# Altium PCB PLC-无线通讯版-显示板-V2.PcbDoc
Units mm, origin at the board's own origin, x right, y up, seen from the top; angles counter-clockwise.
Board outline 112 x 42 mm, 2 copper layers (Top Layer, Bottom Layer), stack 1.271 mm thick; 31 components, 28 nets, 106 pads, 86 vias.
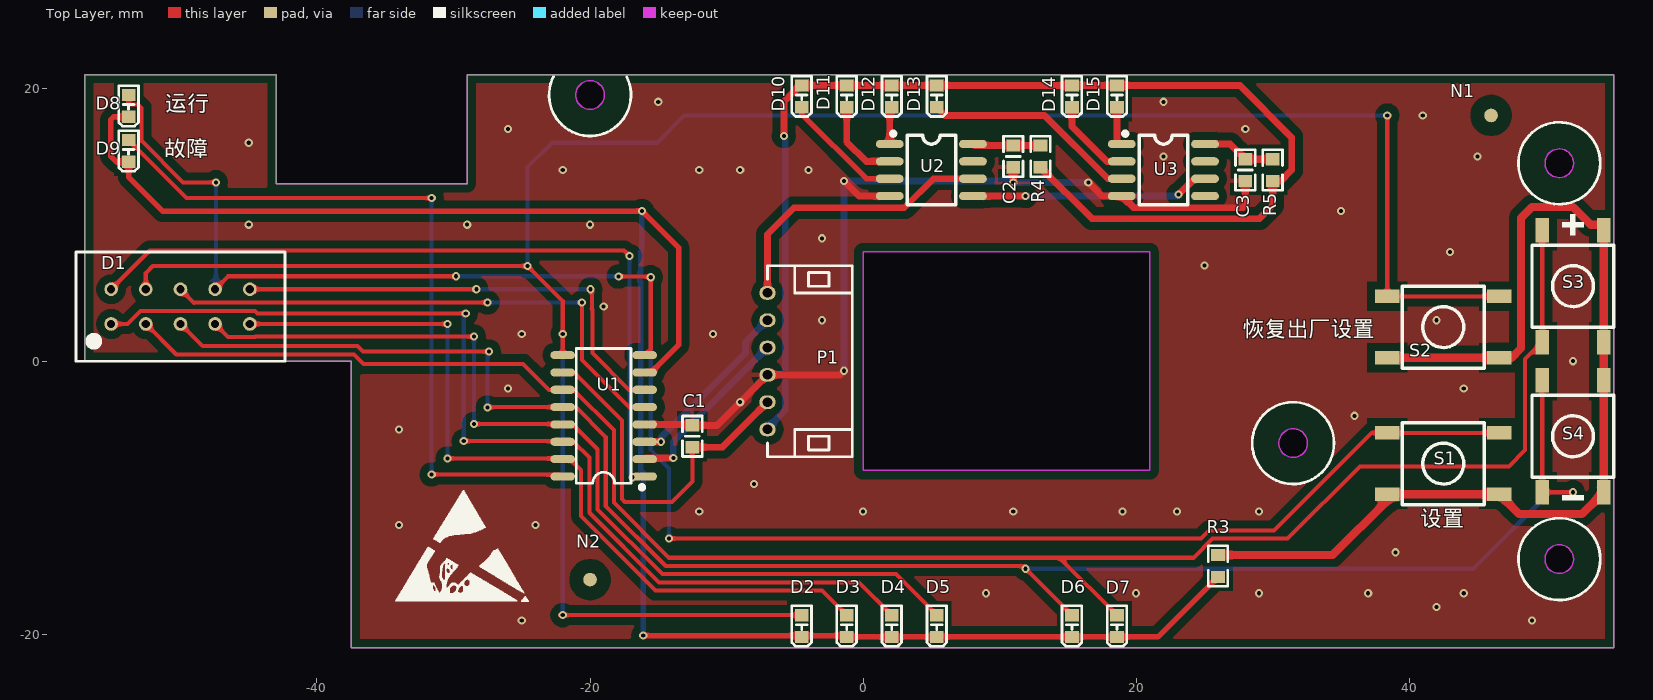
[diagram p0: Top Layer view]
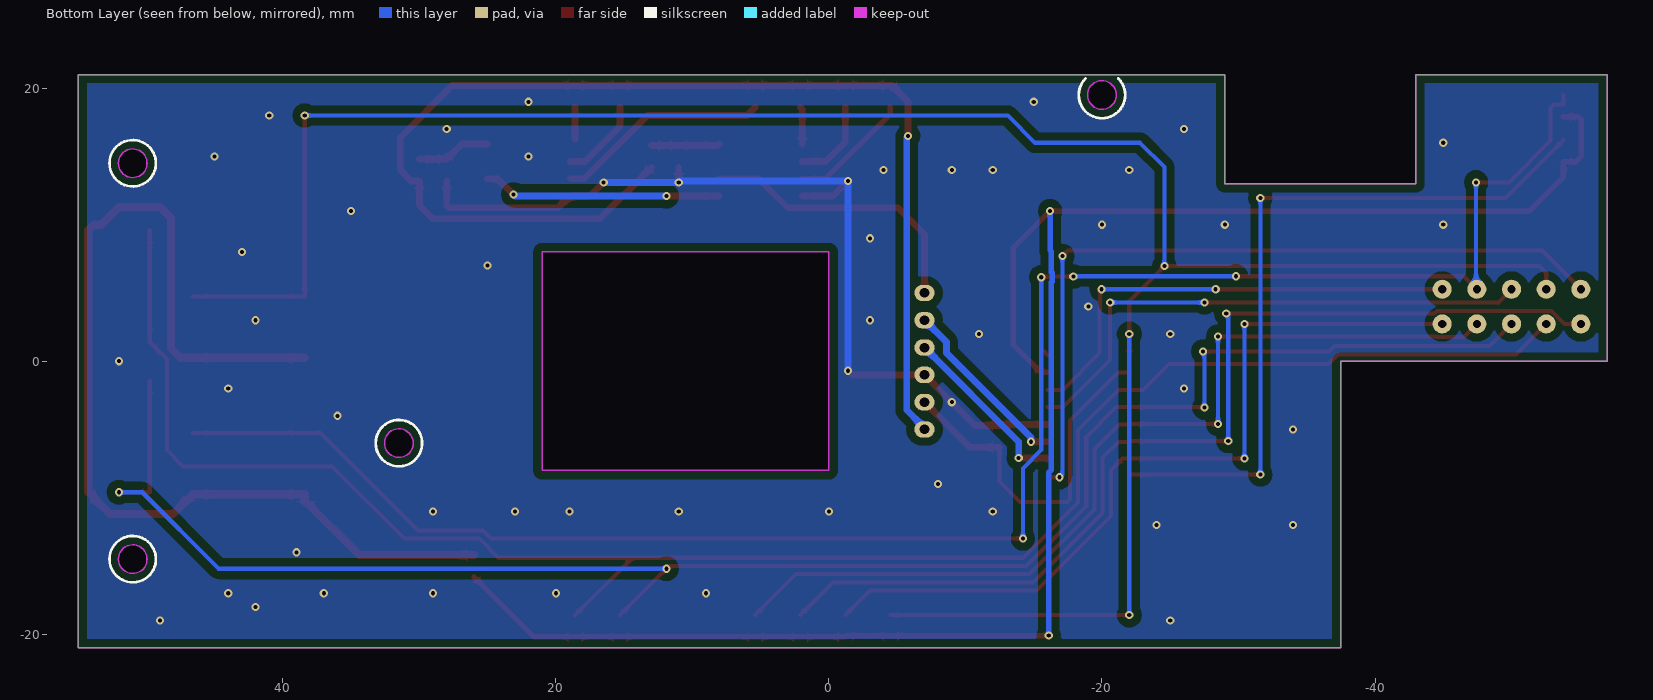
[diagram p1: Bottom Layer view, seen from below]
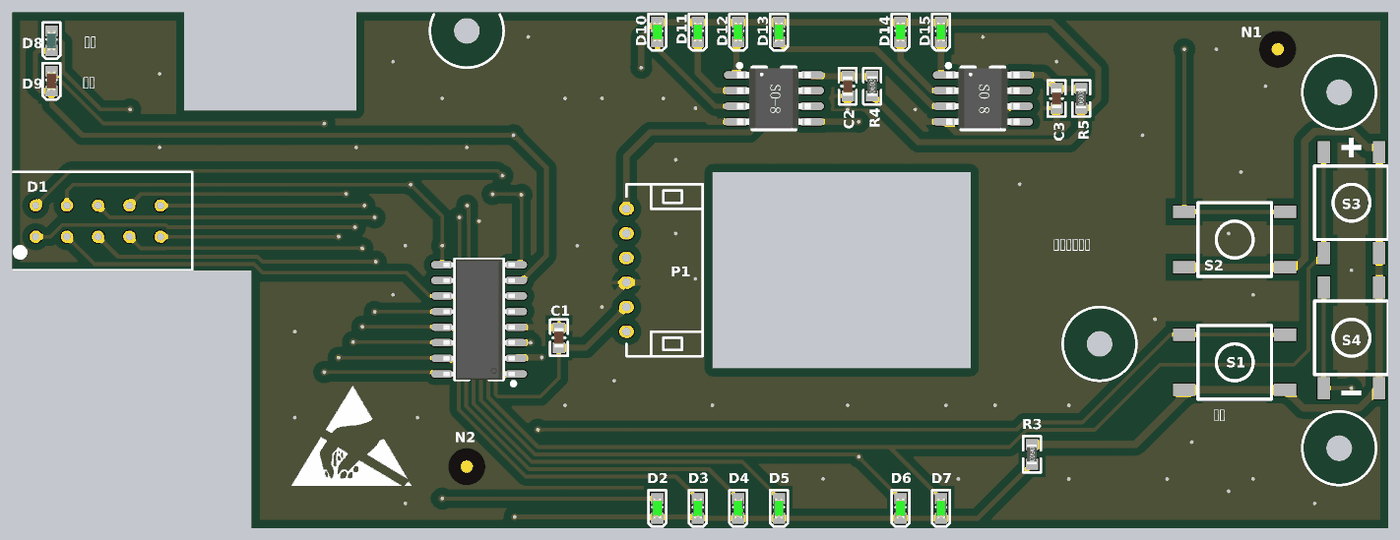
[diagram p2: 3D render of the assembled board from above, using the file's embedded part models]

## Layer stack, top to bottom
Top Solder: solder mask 0.0102, Solder Resist, Dk 3.5
Top Layer: signal copper 0.0356
Dielectric1: dielectric 1.2, FR-4, Dk 4.8
Bottom Layer: signal copper 0.0356
Bottom Solder: solder mask 0.0102, Solder Resist, Dk 3.5

## Board outline
-57,0 -57,21 -43,21 -43,13 -29,13 -29,21 55,21 55,-21 -37.5,-21 -37.5,0
cut-out: -20,20.55 ccw(c-20,19.5) -21.05,19.5 ccw(c-20,19.5) -20,18.45 ccw(c-20,19.5) -18.95,19.5 ccw(c-20,19.5)
cut-out: 51,15.55 ccw(c51,14.5) 49.95,14.5 ccw(c51,14.5) 51,13.45 ccw(c51,14.5) 52.05,14.5 ccw(c51,14.5)
cut-out: 31.5,-4.95 ccw(c31.5,-6) 30.45,-6 ccw(c31.5,-6) 31.5,-7.05 ccw(c31.5,-6) 32.55,-6 ccw(c31.5,-6)
cut-out: 0,-8 21,-8 21,8 0,8
cut-out: 51,-13.45 ccw(c51,-14.5) 49.95,-14.5 ccw(c51,-14.5) 51,-15.55 ccw(c51,-14.5) 52.05,-14.5 ccw(c51,-14.5)

## Design rules (kind name [scope] priority, off if disabled: settings)
Clearance Clearance敷铜间隔 [InPolygon] p1: gap=0.6
Clearance Clearance通用间隔 [All] p2: gap=0.3
PlaneConnect [All] p1: planeconnectstyle=Relief reliefexpansion=0.508 reliefentries=4 reliefconductorwidth=0.3 reliefairgap=0.3
PolygonConnect PolygonConnect_过孔 [All vs IsVia] p1: connectstyle=Direct reliefconductorwidth=0.254 reliefentries=4 polygonreliefangle="90 Angle" airgapwidth=0.254
PolygonConnect [All] p2: connectstyle=Relief reliefconductorwidth=0.3 reliefentries=4 polygonreliefangle="90 Angle" airgapwidth=0.6
RoutingVias [All] p1: holewidth=0.5 width=1 viastyle="Through Hole" minholewidth=0.4 minwidth=0.8 maxholewidth=10 maxwidth=10
SolderMaskExpansion [All] p1: expansion=0.102
Width [All] p1: maxlimit=10 minlimit=0.3 preferedwidth=0.5
29 further rules are at their usual default settings.

## Components (designator, comment, footprint, x,y, rotation, side; value= is the part's Value field where it differs from the comment)
C1 "105" C-0603 -12.5,-5.5 r270 top
C2 "104" C-0603 11,15 r90 top
C3 "104" C-0603 28,14 r90 top
D1 "2351A，黄绿色，没小数点" 3位0.25英寸 -50,4 r0 top
D2 "DI1" LED-0603-GREEN -4.5,-19.4 r90 top
D3 "DI2" LED-0603-GREEN -1.2,-19.4 r90 top
D4 "DI3" LED-0603-GREEN 2.1,-19.4 r90 top
D5 "DI4" LED-0603-GREEN 5.4,-19.4 r90 top
D6 "DO1" LED-0603-GREEN 15.3,-19.4 r90 top
D7 "DO2" LED-0603-GREEN 18.6,-19.4 r90 top
D8 "运行" LED-0603-Blue -53.8,18.7 r90 top
D9 "错误" LED-0603-Red -53.8,15.4 r90 top
D10 "AI1" LED-0603-GREEN -4.5,19.4 r90 top
D11 "AI2" LED-0603-GREEN -1.2,19.4 r90 top
D12 "AI3" LED-0603-GREEN 2.1,19.4 r90 top
D13 "AI4" LED-0603-GREEN 5.4,19.4 r90 top
D14 "AO1" LED-0603-GREEN 15.3,19.4 r90 top
D15 "AO2" LED-0603-GREEN 18.6,19.4 r90 top
N1 "光学定位点" MARK-1mm-3mm 46,18 r0 top
N2 "光学定位点" MARK-1mm-3mm -20,-16 r0 top
P1 "" PH2.0-6AW -7,0 r270 top
R3 "2K" R-0603 26,-15 r270 top
R4 "33" R-0603 13,15 r90 top
R5 "33" R-0603 30,14 r90 top
S1 "恢复出厂设置" SB-6*6*9.5_贴片 42.5,-7.5 r180 top
S2 "设置" SB-6*6*9.5_贴片 42.5,2.5 r180 top
S3 "加" SB-6*6*9.5_贴片 52,5.5 r270 top
S4 "减" SB-6*6*9.5_贴片 52,-5.5 r270 top
U1 "TM1650" SOP-16-M -19,-4 r90 top
U2 "SM16703P" SOP-8-M 5,14 r270 top
U3 "SM16703P" SOP-8-M 22,14 r270 top

## Footprints (in the part's own frame and the unit in brackets; to place one, negate y for a bottom-side part, rotate by r counter-clockwise, add the part's x,y. Pads: shape width x height; smd on the part's side, far side on the other; paste and mask are expansions set on the pad)
3位0.25英寸 [mm]
  round 1 / inner round 1 / far side round 1.4 hole 0.6: 1(-5.08,-1.27) 2(-2.54,-1.27) 3(0,-1.27) 4(2.54,-1.27) 5(5.08,-1.27) 6(5.08,1.27) 7(2.54,1.27) 8(0,1.27) 9(-2.54,1.27) 10(-5.08,1.27)
  silkscreen extent -7.65,-4 7.65,4, body extent -7.65,-4 7.65,4, height 4
C-0603 [mm]
  rect 0.9x1 smd: 1(-0.8,0) 2(0.8,0)
  silkscreen extent -1.48,-0.72 1.48,0.72, body extent -0.8,-0.4 0.8,0.4, height 0.6
LED-0603-Blue [mm]
  rect 0.9x1 smd: 1(0.8,0) 2(-0.8,0)
  silkscreen extent -1.48,-0.72 1.48,0.72, body extent -0.81,-0.4 0.81,0.4, height 0.6
LED-0603-GREEN [mm]
  rect 0.9x1 smd: 1(0.8,0) 2(-0.8,0)
  silkscreen extent -1.48,-0.72 1.48,0.72, body extent -0.81,-0.4 0.81,0.4, height 0.6
LED-0603-Red [mm]
  rect 0.9x1 smd: 1(0.8,0) 2(-0.8,0)
  silkscreen extent -1.48,-0.72 1.48,0.72, body extent -0.81,-0.4 0.81,0.4, height 0.6
MARK-1mm-3mm [mm]
  round 1 smd paste-0.6 mask+1: 1(0,0)
  Top Layer pour cut-out: -1.5,0 -1.386,-0.574 -1.061,-1.061 -0.574,-1.386 0,-1.5 0,-1.5 0.574,-1.386 1.061,-1.061 1.386,-0.574 1.5,0 1.5,0 1.386,0.574 1.061,1.061 0.574,1.386 0,1.5 0,1.5 -0.574,1.386 -1.061,1.061 -1.386,0.574 -1.5,0
PH2.0-6AW [mm]
  oval 1x1.2 / inner oval 1x1.2 / far side oval 1.2x1.5 hole 0.7: 1(5,0) 2(3,0) 3(1,0) 4(-1,0) 5(-3,0) 6(-5,0)
  silkscreen extent -7,0 7,6.2, body extent -7,0 7,6.2, height 4.6
R-0603 [mm]
  rect 0.9x1 smd: 1(-0.8,0) 2(0.8,0)
  silkscreen extent -1.48,-0.72 1.48,0.72, body extent -0.8,-0.4 0.8,0.4, height 0.45
SB-6*6*9.5_贴片 [mm]
  rect 1.8x1 smd: 1(-4.1,2.25) 1(4.1,2.25) 2(-4.1,-2.25) 2(4.1,-2.25)
  silkscreen extent -3,-3 3,3, body extent -3,-3 3,3, height 9.5
SOP-8-M [mil]
  oval 24x80 smd: 1(-75,-120) 2(-25,-120) 3(25,-120) 4(75,-120) 5(75,120) 6(25,120) 7(-25,120) 8(-75,120)
  silkscreen extent -111,-116 100,70, body extent -96,-118 96,118, height 67
SOP-16-M [mm]
  oval 0.6x1.8 smd: 1(-4.445,-3) 2(-3.175,-3) 3(-1.905,-3) 4(-0.635,-3) 5(0.635,-3) 6(1.905,-3) 7(3.175,-3) 8(4.445,-3) 9(4.445,3) 10(3.175,3) 11(1.905,3) 12(0.635,3) 13(-0.635,3) 14(-1.905,3) 15(-3.175,3) 16(-4.445,3)
  silkscreen extent -5.38,-2.95 4.93,2, body extent -4.9,-2.9 4.9,2.9, height 1.75

## Part data
C1 C2 C3: library part Cap, "Capacitor"
D1: library part 3位数码管-无点-2351A
D2 D3 D4 D5 D6 D7 D8 D9 D10 D11 D12 D13 D14 D15: library part LED-0603-Blue
N1 N2: library part 无引脚
P1: library part "Header 6", "Header, 6-Pin"
R3 R4 R5: library part Res2-0603, "0603"
S1 S2 S3 S4: library part SB-6*6*9, "SB-6*6*10"
U1: "共阴数码管驱动器"

## Via types
v1: diameter 0.6, hole 0.3, Top Layer to Bottom Layer, tented both sides, 86 vias

## Nets (pads, with @x,y where several pads share a name; then routed paths per layer and width w, separated by ;. In a path a pad name is that pad's centre, name@x,y a point inside that pad or via, vN(x,y) a via of type N, cw(c..) or ccw(c..) an arc to the next point about the centre after c; other vN are vias at no path point)
3.3V: C1.2 P1.2 U1.10 | length 26.8
  Top Layer w0.3: U1.10 -21.175,-0.825 -17.65,-4.35 -17.65,-10.107 -17.457,-10.3 -14,-10.3 -12.5,-8.8 C1.2
  Top Layer w0.5: C1.2 -10.3,-6.3 P1.2
5V: D10.1 D11.1 D12.1 D13.1 D14.1 D15.1 P1.1 R4.1 R5.1 | length 88.8
  Top Layer w0.5: v1(-5.8,16.5) -5.8,19.028 -4.628,20.2 D10.1 D11.1 D12.1 D13.1 D14.1 D15.1 27.6,20.2 31.4,16.4 31.4,14 30.6,13.2 R5.1 30,11.4 29.04,10.44 16.76,10.44 R4.1
  Bottom Layer w0.5: P1.1 -7,-4.876 -5.7,-3.576 -5.7,16.4 v1(-5.8,16.5)
A: D1.7 D8.1 S1.2 U1.8 | length 140.7
  Top Layer w0.3: D8.1 -53.8,18.8 -53.114,18.8 -52.85,18.536 -52.85,16.15 -49.8,13.1 v1(-47.4,13.1) ; D1.7 -46.51,6.22 v1(-29.825,6.22) ; v1(-17.9,6.2) v1@-15.5,6.2 ; U1.8 -15.55,0.895 v1(-15.55,6.15) ; v1(-14.211,-12.989) 24.762,-12.989 25.351,-12.4 30.1,-12.4 37.25,-5.25 38.4,-5.25 S1.2@46.6,-5.25
  Bottom Layer w0.3: D1.7 -47.4,5.33 v1(-47.4,13.1) ; v1(-29.825,6.22) v1@-17.9,6.22 ; v1@-15.5,6.2 v1(-15.55,6.15) -15.55,-6.511 -14.211,-7.85 v1(-14.211,-12.989)
B: D1.9 D2.1 S2.2 U1.9 | length 168.7
  Top Layer w0.3: D1.9 -52.54,6.46 -52.03,6.97 v1(-24.57,6.97) -22,4.4 v1(-22,2) U1.9 ; v1(-22,-18.6) -22.2,-18.6 D2.1 ; v1(38.4,18) 38.4,4.75 S2.2@46.6,4.75
  Bottom Layer w0.3: v1(-24.57,6.97) -24.57,14.23 -22.8,16 -15.1,16 -13.1,18 v1(38.4,18) ; v1(-22,-18.6) v1(-22,2)
C: D1.2 D7.1 S3.2 U1.11 | length 137.1
  Top Layer w0.3: D1.2 -50.31,0.5 -37.293,0.5 -36.6,-0.193 -36.6,-0.2 -24.9,-0.2 -23.005,-2.095 U1.11 -21.205,-2.095 -18.25,-5.05 -18.25,-10.356 -14.206,-14.4 14.4,-14.4 ; D7.1 14.4,-14.4 ; S3.2@49.75,9.6 49.75,1.4 48.5,0.15 48.5,-6.5 47.3,-7.7 36.4,-7.7 31.1,-13 25.6,-13 24.2,-14.4 14.4,-14.4
D: D1.3 D6.1 S4.2 U1.12 | length 132.5
  Top Layer w0.3: D1.3 -48.37,1.1 -37.044,1.1 -36.644,0.7 v1(-27.4,0.7) ; v1(-27.5,-3.4) -27.465,-3.365 U1.12 -21.035,-3.365 -18.85,-5.55 -18.85,-10.604 -14.454,-15 11.7,-15 D6.1 ; S4.2@49.75,-1.4 49.75,-9.6 v1(52,-9.6)
  Bottom Layer w0.3: v1(-27.5,-3.4) -27.5,0.6 v1(-27.4,0.7) ; v1(11.9,-15.2) 44.7,-15.2 50.3,-9.6 v1(52,-9.6)
DIG1: D1.10 U1.1 | length 56.6
  Top Layer w0.3: D1.10 -52.25,8.1 -17.5,8.1 v1(-17.1,7.7) ; v1(-16.9,-8.5) -16.255,-8.5 -16.155,-8.4 -16.055,-8.5 U1.1
  Bottom Layer w0.3: v1(-17.1,7.7) -17.1,-8.3 v1(-16.9,-8.5)
DIG2: D1.8 U1.5 | length 40.1
  Top Layer w0.3: D1.8 -49.01,4.28 -48.99,4.3 v1(-27.5,4.3) ; v1(-20.6,4.3) -20.6,0.1 -17.135,-3.365 U1.5
  Bottom Layer w0.3: v1(-27.5,4.3) v1(-20.6,4.3)
DIG3: D1.6 U1.6 | length 34.6
  Top Layer w0.3: D1.6 v1(-28.33,5.27) ; v1(-19.97,5.27) -19.85,5.15 -19.85,3.869 -19.876,3.844 -19.826,3.794 -19.826,0.6 -17.131,-2.095 U1.6
  Bottom Layer w0.3: v1(-28.33,5.27) v1(-19.97,5.27)
DIG4: D2.2 D3.2 D4.2 D5.2 D6.2 D7.2 D8.2 D9.2 R3.2 U1.7 | length 134.6
  Top Layer w0.4: D8.2 -54.9,17.9 -55.1,17.7 -55.1,15 -54.7,14.6 D9.2 -53.8,13.5 -51.3,11 v1(-16.2,11) -13.5,8.3 -13.5,1.214 -15.539,-0.825 U1.7 ; v1(-16.1,-20.1) D3.2@-1.3,-20.1 ; D3.2 D4.2 D5.2 D6.2 D7.2 21.6,-20.2 R3.2
  Bottom Layer w0.4: v1(-16.2,11) -16.2,8.131 -16.3,8.031 -16.3,6.531 -16.35,6.481 -16.35,5.819 -16.3,5.769 -16.3,-7.969 -16.1,-8.169 -16.1,-8.831 v1(-16.1,-20.1)
DP: D9.1 U1.16 | length 53.9
  Top Layer w0.3: D9.1 -49.55,11.95 v1(-31.6,11.95) ; v1(-31.6,-8.3) -22.145,-8.3 U1.16
  Bottom Layer w0.3: v1(-31.6,-8.3) v1(-31.6,11.95)
E: D1.4 D5.1 U1.13 | length 68
  Top Layer w0.3: D1.4 -46.51,1.78 -44.526,1.78 -44.506,1.8 v1(-28.5,1.8) ; v1(-28.5,-4.6) -22.035,-4.6 U1.13 -21.265,-4.635 -19.45,-6.45 -19.45,-10.853 -14.703,-15.6 2.4,-15.6 D5.1
  Bottom Layer w0.3: v1(-28.5,-4.6) v1(-28.5,1.8)
F: D1.1 D4.1 U1.14 | length 74.9
  Top Layer w0.3: D1.1 -53.884,2.73 -52.934,3.68 -44.526,3.68 -44.346,3.5 v1(-29.1,3.5) ; v1(-29.25,-5.85) -22.055,-5.85 U1.14 -21.195,-5.905 -20.05,-7.05 -20.05,-11.101 -14.951,-16.2 -0.3,-16.2 D4.1
  Bottom Layer w0.3: v1@-29.3,-5.9 v1(-29.25,-5.85) -29.25,3.35 v1(-29.1,3.5)
G: D1.5 D3.1 U1.15 | length 60.3
  Top Layer w0.3: D1.5 v1(-30.43,2.73) ; v1(-30.43,-7.13) -21.504,-7.13 -20.65,-7.984 -20.65,-11.35 -15.2,-16.8 -3,-16.8 D3.1
  Bottom Layer w0.3: v1(-30.43,-7.13) v1(-30.43,2.73)
GND: C1.1 C2.1 C3.1 P1.3 U1.4 U2.4 U3.4 | length 67.2
  Top Layer w0.3: C1.1@-12.565,-4.635 C1.1
  Top Layer w0.5: U1.4 C1.1@-12.565,-4.635 ; C1.1 -10.7,-4.7 P1.3 -1.7,-1 v1(-1.4,-0.7) ; v1(-1.4,13.2) -0.295,12.095 U2.4 ; v1(11,13.1) C2.1 ; v1(16.5,13.1) 17.505,12.095 U3.4 19.807,11.24 27.84,11.24 28,11.4 C3.1
  Bottom Layer w0.5: v1(-1.4,-0.7) v1(-1.4,13.2) 10.9,13.2 v1(11,13.1) v1(16.5,13.1)
  other v1: -25,-19 49,-19 42,-18 9,-17 20,-17 29,-17 37,-17 44,-17 39,-14 -34,-12 -24,-12 -12,-11 0,-11 11,-11 19,-11 23,-11 29,-11 -8,-9 -34,-5 36,-4 -9,-3 -26,-2 44,-2 52,0 -25,2 -11,2 -3,3 42,3 -19,4 25,7 43,8 -3,9 -45,10 -29,10 -20,10 35,11 -22,14 -12,14 -9,14 -4,14 22,15 45,15 -45,16 -26,17 28,17 41,18 -15,19 22,19
LED-亮度数据: P1.6 U2.6 | length 21
  Top Layer w0.5: P1.6 -7,9.3 -5.06,11.24 3.017,11.24 5.142,13.365 U2.6
NetC2_2: C2.2 R4.2 U2.8 | length 5
  Top Layer w0.5: U2.8 8.153,15.8 R4.2
NetC3_2: C3.2 R5.2 U3.8 | length 5.4
  Top Layer w0.5: U3.8 26.895,15.905 C3.2 R5.2
NetD10_2: D10.2 U2.3 | length 8.9
  Top Layer w0.4: D10.2 -4.5,18.1 0.235,13.365 U2.3
NetD11_2: D11.2 U2.2 | length 6.3
  Top Layer w0.5: D11.2 -1.2,16.07 0.235,14.635 U2.2
NetD12_2: D12.2 U2.1 | length 2.8
  Top Layer w0.5: U2.1 1.952,18.452 D12.2
NetD13_2: D13.2 U3.3 | length 15.7
  Top Layer w0.5: D13.2 6,18 13.3,18 17.935,13.365 U3.3
NetD14_2: D14.2 U3.2 | length 6.1
  Top Layer w0.5: D14.2 15.3,17.2 17.865,14.635 U3.2
NetD15_2: D15.2 U3.1 | length 2.3
  Top Layer w0.5: 18.6,16.257 D15.2
NetR3_1: R3.1 S1.1 S2.1 S3.1 S4.1 | length 77.5
  Top Layer w0.6: R3.1 34.4,-14.2 38.4,-10.2 38.4,-9.75 46.6,-9.75 48.05,-11.2 52.65,-11.2 54.25,-9.6 54.25,-1.4 54.25,1.4 54.25,9.6 53.85,10 53.3,10 52,11.3 49,11.3 48.2,10.5 48.2,0.95 47.5,0.25 46.6,0.25 S2.1@38.4,0.25
NetU2_5: U2.5 U3.6 | length 17.5
  Top Layer w0.5: U2.5 v1(11.895,12.095) v1@11.9,12.1 ; v1(23.1,12.2) 24.265,13.365 U3.6
  Bottom Layer w0.5: v1(11.895,12.095) 22.995,12.095 v1(23.1,12.2)
SCL: P1.4 U1.2 | length 13.1
  Top Layer w0.5: U1.2 -15.925,-7.1 v1(-13.9,-7.1)
  Bottom Layer w0.5: v1(-13.9,-7.1) -13.9,-5.9 P1.4
SDA: P1.5 U1.3 | length 13.3
  Top Layer w0.5: U1.3 -15.995,-5.9 v1(-14.8,-5.9)
  Bottom Layer w0.5: v1(-14.8,-5.9) -14.8,-5.6 -8.6,0.6 -8.6,1.4 P1.5
pads on no net: N1.1 N2.1 U2.7 U3.5 U3.7

## Polygon pours and split planes (outlines as drawn)
GND on Bottom Layer "Mechanical 15-No Net" (solid, remove dead copper, pour order 2): -57,21 -43,21 -43,13 -29,13 -29,21 55,21 55,-21 -37.5,-21 -37.5,0 -57,0
GND on Top Layer "Mechanical 15-No Net" (solid, remove dead copper, pour order 4): -57,21 -43,21 -43,13 -29,13 -29,21 55,21 55,-21 -37.5,-21 -37.5,0 -57,0

## Keep-outs
Keep-Out Layer:
  circle w0.1: c-20,19.5 r1.05
  circle w0.1: c51,14.5 r1.05
  circle w0.1: c31.5,-6 r1.05
  circle w0.1: c51,-14.5 r1.05
  lines w0.1: -57,0 -57,21 -43,21 -43,13 -29,13 -29,21 55,21 55,-21 -37.5,-21 -37.5,0 -57,0 ; 0,-8 21,-8 21,8 0,8 0,-8

## Other copper
Top Layer:
  pour cut-out: -23,19.5 ccw(c-20,19.5) -20,16.5 ccw(c-20,19.5) -17,19.5 ccw(c-20,19.5) -20,22.5 ccw(c-20,19.5)
  pour cut-out: -21.7,19.5 ccw(c-20,19.5) -20,17.8 ccw(c-20,19.5) -18.3,19.5 ccw(c-20,19.5) -20,21.2 ccw(c-20,19.5)
  pour cut-out: 48,14.5 ccw(c51,14.5) 51,11.5 ccw(c51,14.5) 54,14.5 ccw(c51,14.5) 51,17.5 ccw(c51,14.5)
  pour cut-out: 49.3,14.5 ccw(c51,14.5) 51,12.8 ccw(c51,14.5) 52.7,14.5 ccw(c51,14.5) 51,16.2 ccw(c51,14.5)
  pour cut-out: 28.5,-6 ccw(c31.5,-6) 31.5,-9 ccw(c31.5,-6) 34.5,-6 ccw(c31.5,-6) 31.5,-3 ccw(c31.5,-6)
  pour cut-out: 29.8,-6 ccw(c31.5,-6) 31.5,-7.7 ccw(c31.5,-6) 33.2,-6 ccw(c31.5,-6) 31.5,-4.3 ccw(c31.5,-6)
  pour cut-out: 49.3,-14.5 ccw(c51,-14.5) 51,-16.2 ccw(c51,-14.5) 52.7,-14.5 ccw(c51,-14.5) 51,-12.8 ccw(c51,-14.5)
  pour cut-out: 48,-14.5 ccw(c51,-14.5) 51,-17.5 ccw(c51,-14.5) 54,-14.5 ccw(c51,-14.5) 51,-11.5 ccw(c51,-14.5)

## Silkscreen, mask and mechanical layers (free items; w line width, h text height)
Top Overlay:
  drawing of 781 lines, arcs and shapes, not listed
  text "运行" at -51.1,17.9 h2
  text "故障" at -51.2,14.6 h2
  text "恢复出厂设置" at 27.8,1.4 h2
  text "设置" at 40.8,-12.5 h2
Bottom Overlay:
  circle w0.2: c51,14.5 r1.7
  circle w0.2: c31.5,-6 r1.7
  circle w0.2: c51,-14.5 r1.7
  lines w0.2: -21.202,20.702 ccw(c-20,19.5) -18.798,20.702
Mechanical 9:
  lines w0.1: -39,-19.4 37.5,-19.4 ; -39,19.4 37.5,19.4 ; -33.5,-21.5 -33.5,-18 ; -33.5,18 -33.5,21.5 ; -30.2,-21.5 -30.2,-18 ; -30.2,18 -30.2,21.5 ; -26.9,-21.5 -26.9,-18 ; -26.9,18 -26.9,21.5 ; -23.6,-21.5 -23.6,-18 ; -20.3,-21.5 -20.3,-18 ; -17,-21.5 -17,-18 ; -13.7,-21.5 -13.7,-18 ; -10.4,-21.5 -10.4,-18 ; -10.4,18 -10.4,21.5 ; -5,-20.4 -5,-17.4 ; -4.5,17.4 -4.5,20.4 ; -1.7,-21.5 -1.7,-18 ; -1.7,18 -1.7,21.5 ; 1.6,-21.5 1.6,-18 ; 1.6,18 1.6,21.5 ; 4.9,-21.5 4.9,-18 ; 4.9,18 4.9,21.5 ; 8.2,-21.5 8.2,-18 ; 8.2,18 8.2,21.5 ; 11.5,-21.5 11.5,-18 ; 11.5,18 11.5,21.5 ; 14.8,-21.5 14.8,-18 ; 14.8,18 14.8,21.5 ; 18.1,-21.5 18.1,-18 ; 18.1,18 18.1,21.5
Mechanical 14:
  lines w0.1: -60,0 60,0 ; -53.8,10 -53.8,42.3 ; -39,-26.5 57.5,-26.5 ; -39,26.5 57.5,26.5 ; 0,-40 0,40 ; -58.5,-0.5 -41.5,-0.5 ; -58.5,-0.5 -58.5,8.4 ; -58.5,-0.5 -41.5,8.4 ; -58.5,8.4 -41.5,8.4 ; -58.5,8.4 -41.5,-0.5 ; -41.5,-0.5 -41.5,8.4
Mechanical 15:
  lines w0.1: -73.5,-24 69,-24 ; -60,-0.5 -39,-0.5 -39,-40 ; -54.7,22 -52.3,22 ; -53.8,15.4 -52.4,15.4 ; -53.8,18.7 -52.3,18.7 ; -50.5,-31.5 -50.5,31.5 ; -41.2,40 -41.2,24 -39,24 -39,40 ; -14.2,-41.4 -14.2,-28.4 ; 32.7,-41.4 32.7,-28.4 ; 39,-7.5 46,-7.5 ; 42.8,-13 42.8,18 ; 50.5,-31.5 50.5,31.5 ; -60,-40 -60,40 59.5,40 59.5,-40 -60,-40 ; -54.6,14.6 -54.6,16.2 -53,16.2 -53,14.6 -54.6,14.6 ; -54.6,17.9 -54.6,19.5 -53,19.5 -53,17.9 -54.6,17.9 ; -54.6,21.2 -54.6,22.8 -53,22.8 -53,21.2 -54.6,21.2 ; 47.2,-11 56.65,-11 56.65,11 47.2,11 47.2,-11
  lines w0.2: -43.5,-117.5 44.5,-117.5 ; -43.5,-111.5 44.5,-111.5 ; -43.5,-105.5 44.5,-105.5 ; -43.5,-99.5 44.5,-99.5 ; -43.5,-93.5 44.5,-93.5 ; -43.5,-87.5 44.5,-87.5 ; -43.5,-81.5 44.5,-81.5 ; -21.5,-123.5 -21.5,-75.5 -21.5,-69.5 ; -43.5,-75.5 -43.5,-123.5 44.5,-123.5 44.5,-75.5 ; -43.5,-75.5 44.5,-75.5 ; -43.5,-75.5 -43.5,-69.5 44.5,-69.5 44.5,-75.5
  text "邵宁鹏20180202" at 51.6,-19.2 h0.1
  text "公司" at -42.5,-74.5 h5
  text "杭州久天科技有限公司" at -18.5,-74.5 h5
  text "工程" at -42.5,-80.5 h5
  text "设计" at -42.5,-86.5 h5
  text "邵宁鹏" at -18.5,-86.5 h5
  text "日期" at -42.5,-92.5 h5
  text "板厚" at -42.5,-98.5 h5
  text "1.2mm" at -18.5,-98.5 h5
  text "阻焊油" at -42.5,-104.5 h5
  text "绿色" at -18.5,-104.5 h5
  text "丝印" at -42.5,-110.5 h5
  text "白色" at -18.5,-110.5 h5
  text "板材" at -42.5,-116.5 h5
  text "FR-4" at -18.5,-116.5 h5
  text "其他" at -42.5,-122.5 h5
  text "有铅喷锡，过孔盖油" at -18.5,-122.5 h5

## Dimensions
-57,21 to 55,-21 on Mechanical 15
56,-21 to 56,21 on Mechanical 15